# Altium PCB PMOD_SSD.PcbDoc
Units mm, origin at the board's own origin, x right, y up, seen from the top; angles counter-clockwise.
Board outline 40 x 40 mm, 2 copper layers (Top Layer, Bottom Layer); 14 components, 20 nets, 56 pads, 0 vias.
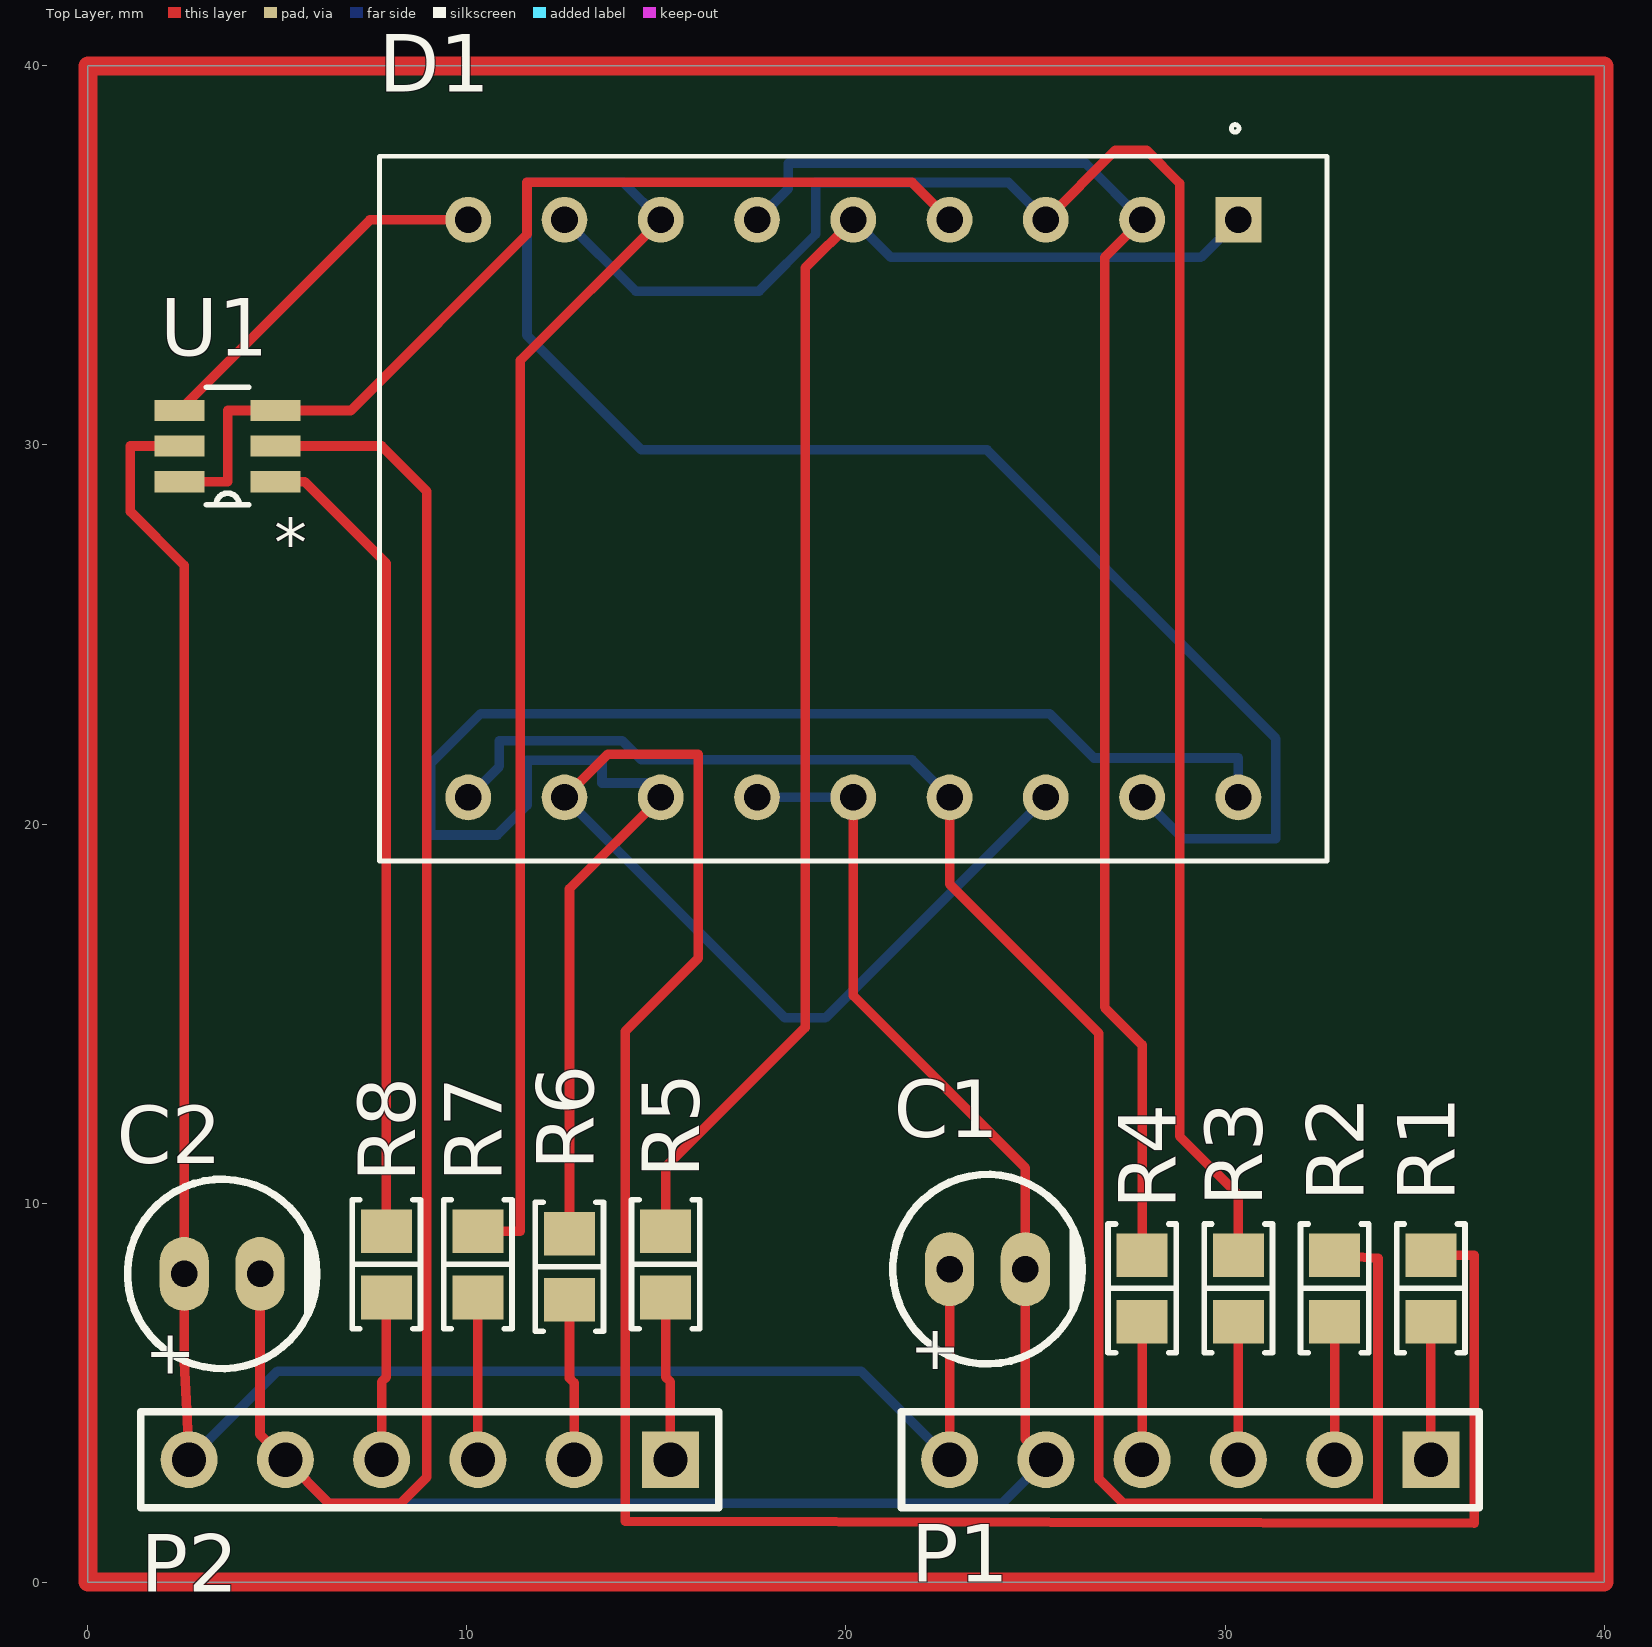
[diagram p0: Top Layer view]
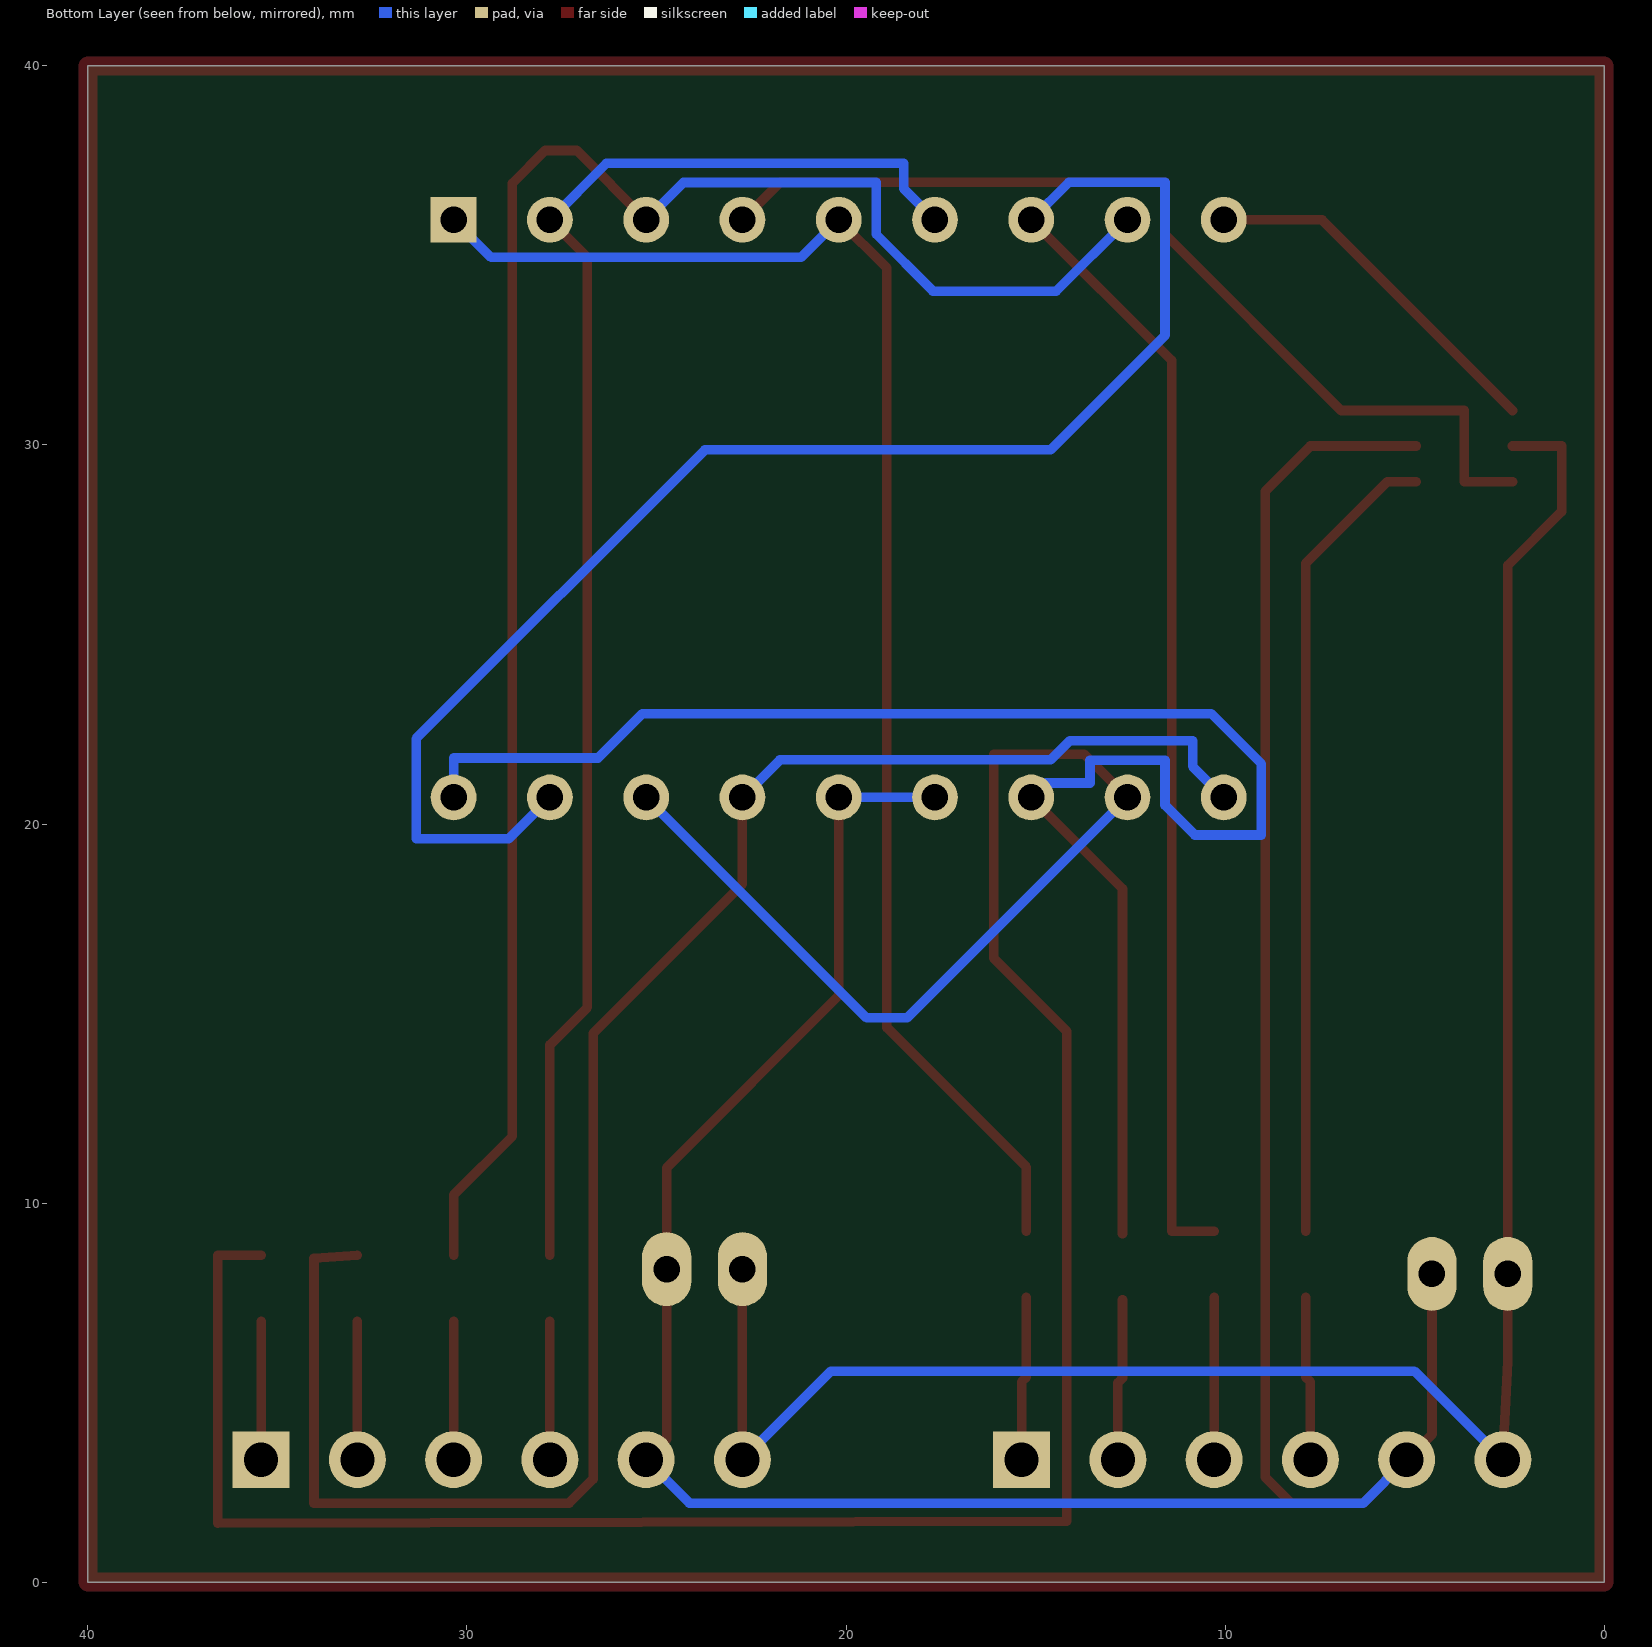
[diagram p1: Bottom Layer view, seen from below]
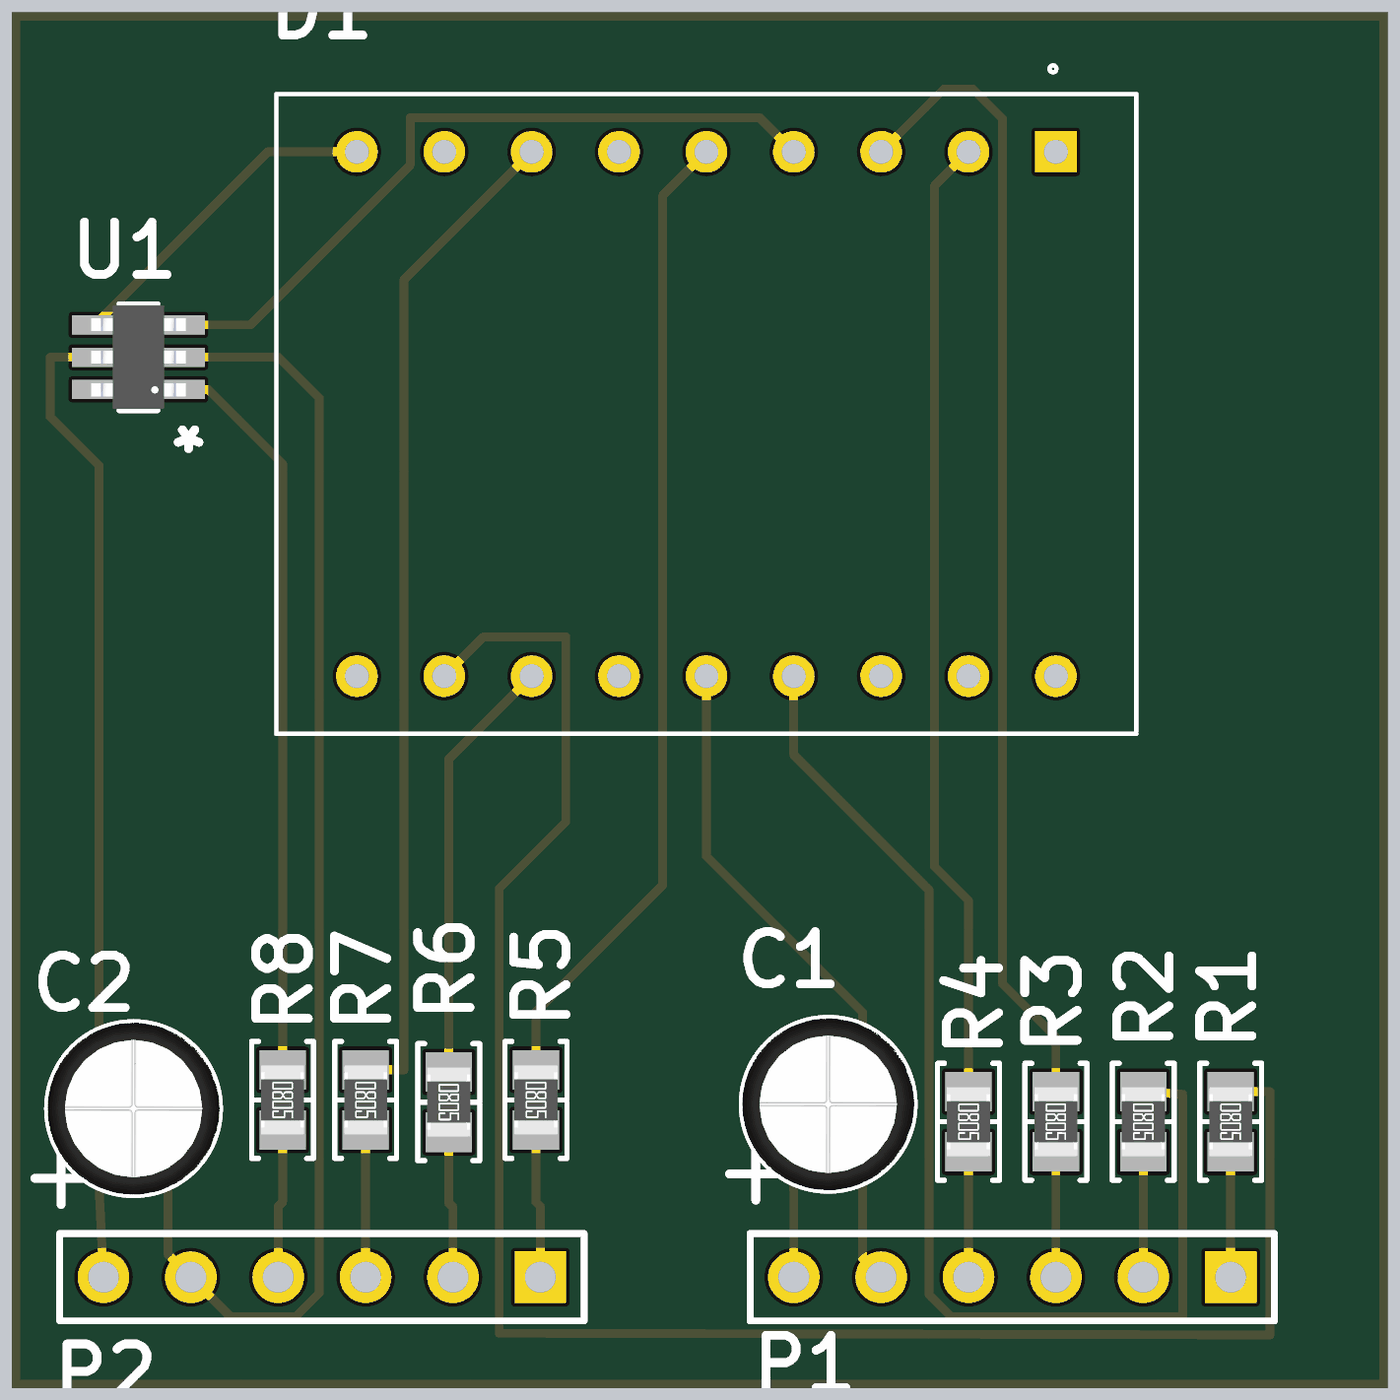
[diagram p2: 3D render of the assembled board from above, using the file's embedded part models]

## Layer stack, top to bottom
Top Solder: solder mask 0.0102, Solder Resist, Dk 3.5
Top Layer: signal copper 0.0356
Dielectric 1: dielectric 0.32, FR-4, Dk 4.8
Bottom Layer: signal copper 0.0356
Bottom Solder: solder mask 0.0102, Solder Resist, Dk 3.5

## Board outline
0,0 0,40 40,40 40,0

## Design rules (kind name [scope] priority, off if disabled: settings)
Clearance [All] p1: gap=0.254 ignorepadtopadclearanceinfootprint=FALSE except(0: Arc-Hole Track-Hole SMDPad-Hole THPad-Hole Via-Hole Fill-Hole Poly-Hole Region-Hole Text-Hole)
PolygonConnect [All] p1: connectstyle=Relief reliefconductorwidth=0.254 reliefentries=4 polygonreliefangle="90 Angle" airgapwidth=0.254
RoutingVias [All] p1: holewidth=0.711 width=1.27 viastyle="Through Hole" minholewidth=0.711 minwidth=1.27 maxholewidth=0.711 maxwidth=1.27
SolderMaskExpansion [All] p1: expansion=0.102 istentingtop=FALSE
Width Width_3 [All] p1: maxlimit=0.254 minlimit=0.254 preferedwidth=0.254
Width Width_2 [All] p2 off: maxlimit=0.254 minlimit=0.254 preferedwidth=0.254
Width Width_1 [All] p3 off: maxlimit=0.254 minlimit=0.254 preferedwidth=0.254
Width [All] p4: maxlimit=1.2 minlimit=0.6 preferedwidth=0.85 checkconnectedcopper=TRUE
30 further rules are at their usual default settings.

## Classes and differential pairs
component class Sheet1: C1 C2 D1 P1 P2 R1 R2 R3 R4 R5 R6 R7 R8

## Components (designator, comment, footprint, x,y, rotation, side; value= is the part's Value field where it differs from the comment)
C1 "0.1uF" "CAP TH ALUM ELEC D5.00mm S2.00mm H12.00mm" 23.733,8.255 r180 top value=1µF
C2 "1µF" "CAP TH ALUM ELEC D5.00mm S2.00mm H12.00mm" 3.54,8.128 r180 top
D1 "DISP1" LED_HDSP-523G 20.193,28.321 r270 top
P1 "Header 6" HDR1X6 35.434,3.227 r180 top
P2 "Header 6" HDR1X6 15.367,3.227 r180 top
R1 "820" "RES 0805_2012" 35.434,7.747 r270 top
R2 "820" "RES 0805_2012" 32.893,7.747 r270 top
R3 "820" "RES 0805_2012" 30.354,7.747 r270 top
R4 "820" "RES 0805_2012" 27.813,7.747 r270 top
R5 "820" "RES 0805_2012" 15.24,8.382 r270 top
R6 "820" "RES 0805_2012" 12.704,8.318 r270 top
R7 "820" "RES 0805_2012" 10.287,8.382 r270 top
R8 "820" "RES 0805_2012" 7.874,8.382 r270 top
U1 "NL27WZ14DTT1G" SOT95P275X110-6N 3.683,29.972 r180 top

## Footprints (in the part's own frame and the unit in brackets; to place one, negate y for a bottom-side part, rotate by r counter-clockwise, add the part's x,y. Pads: shape width x height; smd on the part's side, far side on the other; paste and mask are expansions set on the pad)
"CAP TH ALUM ELEC D5.00mm S2.00mm H12.00mm" [mm] "5mm Diameter 2mm Lead Spacing Aluminum Electrolytic Capacitors Radial, Can"
  oval 1.3x1.95 hole 0.7: 1(1,0) 2(-1,0)
  silkscreen extent -2.5,-2.5 2.5,2.5, body extent -2.51,-2.5 2.5,2.5, height 12
HDR1X6 [mm] "Connector; Header; 6 Position"
  rect 1.5x1.5 hole 0.9: 1(0,0)
  round 1.5 hole 0.9: 2(2.54,0) 3(5.08,0) 4(7.62,0) 5(10.16,0) 6(12.7,0)
  silkscreen extent -1.27,-1.27 13.97,1.27
LED_HDSP-523G [mm]
  rect 1.208x1.208 hole 0.7: 1(-7.62,10.16)
  round 1.208 hole 0.7: 2(-7.62,7.62) 3(-7.62,5.08) 4(-7.62,2.54) 5(-7.62,0) 6(-7.62,-2.54) 7(-7.62,-5.08) 8(-7.62,-7.62) 9(-7.62,-10.16) 10(7.62,-10.16) 11(7.62,-7.62) 12(7.62,-5.08) 13(7.62,-2.54) 14(7.62,0) 15(7.62,2.54) 16(7.62,5.08) 17(7.62,7.62) 18(7.62,10.16)
  silkscreen extent -10.13,-12.5 9.3,12.5
"RES 0805_2012" [mm] "Chip Resistor, 2-Leads, Body 2.00x1.25mm, IPC Medium Density"
  rect 1.15x1.35 smd: 1(-0.875,0) 2(0.875,0)
  silkscreen extent -1.7,-0.9 1.7,0.9, body extent -1,-0.62 1,0.63, height 0.6
SOT95P275X110-6N [mil]
  rect 52x22 smd: 1(-50,37) 2(-50,0) 3(-50,-37) 4(50,-37) 5(50,0) 6(50,37)
  silkscreen extent -22,-61 22,61, body extent -54,-59 54,59, height 43

## Part data
C1: library part UKL2A010KDD, "CAP ALUM 1UF 10% 100V RADIAL", Capacitance=1µF, Device Package="Radial, Can", Lifetime @ Temp.="2000 Hrs @ 85°C", manufacturer=Nichicon, Operating Temperature="-40°C ~ 85°C", Ripple Current @ High Frequency="38mA @ 10kHz", Ripple Current @ Low Frequency="19mA @ 120Hz", Supplier Part Number 1=493-15407-ND, Tolerance=±10%, Voltage - Rated=100V, Applications="General Purpose", componentlink1description=Datasheet, componentlink1url=http://nichicon-us.com/english/products/pdfs/e-ukl.pdf, componentlink2description="DigiKey Link", componentlink2url=http://digikey.com/product-detail/en/nichicon/UKL2A010KDD/493-15407-ND/2598552, Height - Seated (Max)="0.472\" (12.00mm)", lastupdated="4.09.2020 23:28:57", Lead Spacing="0.079\" (2.00mm)", Lifecycle Status=Active, Minimum Order=1, Mounting Type="Through Hole", Package / Case="Radial, Can", packaging=Bulk, Part Number=UKL2A010KDD, Part Status=Active, partid=21600, Polarization=Polar, price=0.35, series=UKL, Size / Dimension="0.197\" Dia (5.00mm)", Supplier 1=DigiKey
C2: library part UKL2A010KDD, "CAP ALUM 1UF 10% 100V RADIAL", Device Package="Radial, Can", Lifetime @ Temp.="2000 Hrs @ 85°C", manufacturer=Nichicon, Operating Temperature="-40°C ~ 85°C", Ripple Current @ High Frequency="38mA @ 10kHz", Ripple Current @ Low Frequency="19mA @ 120Hz", Supplier Part Number 1=493-15407-ND, Tolerance=±10%, Voltage - Rated=100V, Applications="General Purpose", Capacitance=1µF, componentlink1description=Datasheet, componentlink1url=http://nichicon-us.com/english/products/pdfs/e-ukl.pdf, componentlink2description="DigiKey Link", componentlink2url=http://digikey.com/product-detail/en/nichicon/UKL2A010KDD/493-15407-ND/2598552, Height - Seated (Max)="0.472\" (12.00mm)", lastupdated="4.09.2020 23:28:57", Lead Spacing="0.079\" (2.00mm)", Lifecycle Status=Active, Minimum Order=1, Mounting Type="Through Hole", Package / Case="Radial, Can", packaging=Bulk, Part Number=UKL2A010KDD, Part Status=Active, partid=21600, Polarization=Polar, price=0.35, series=UKL, Size / Dimension="0.197\" Dia (5.00mm)", Supplier 1=DigiKey
D1: library part HDSP-523G, "Display Modules - LED Character and Numeric Green 7-Segment 2 Character Common Cathode 2V 10mA 0.732 H x 0.984 W x 0.315 D (18.60mm x 25.00mm x 8.00mm) 18-DIP (0.600, 15.24mm)", Package=None, Availability="In Stock", Check_prices=https://www.snapeda.com/parts/HDSP-523G/Broadcom+Limited/view-part/?ref=eda, MF="Broadcom Limited", MP=HDSP-523G, price=None, Purchase-URL=https://pricing.snapeda.com/search/part/HDSP-523G/?ref=eda, SnapEDA_Link=https://www.snapeda.com/parts/HDSP-523G/Broadcom+Limited/view-part/?ref=snap
P1 P2: "Header, 6-Pin", LatestRevisionDate=17-Jul-2002, LatestRevisionNote="Re-released for DXP Platform.", Publisher="Altium Limited"
R1 R2 R3 R4 R5 R6 R7 R8: library part RNCS0805BKE49R9, "RES 49.9 OHM 0.1% 1/10W 0805", Device Package="0805 (2012 Metric)", manufacturer="Stackpole Electronics Inc", Operating Temperature="-55°C ~ 155°C", Power (Watts)="0.1W, 1/10W", Ratings=AEC-Q200, Resistance="49.9 Ohms", Supplier Device Package=0805, Supplier Part Number 1=RNCS0805BKE49R9CT-ND, Temperature Coefficient=±25ppm/°C, Tolerance=±0.1%, componentlink1description=Datasheet, componentlink1url=https://www.seielect.com/catalog/sei-rncs_rnch.pdf, componentlink2description="DigiKey Link", componentlink2url=https://www.digikey.com/en/products/detail/stackpole-electronics-inc/RNCS0805BKE49R9/1800098, Composition="Thin Film", Features="Anti-Corrosive, Automotive AEC-Q200, Moisture Resistant", Height - Seated (Max)="0.026\" (0.65mm)", lastupdated="9.06.2023 19:55:35", Lifecycle Status=Active, Minimum Order=1, Number of Terminations=2, Package / Case="0805 (2012 Metric)", packaging=TapeAndReel, Part Number=RNCS0805BKE49R9, Part Status=Active, partid=27719, price=0.07, series=RNCS, Size / Dimension="0.079\" L x 0.049\" W (2.00mm x 1.25mm)", Supplier 1=DigiKey
U1: "Inverter IC 2 Channel Schmitt Trigger 6-TSOP", Package="TSOP-6 ON Semiconductor", Availability="In Stock", Check_prices=https://www.snapeda.com/parts/NL27WZ14DTT1G/ON%20Semiconductor/view-part/292209/?ref=eda, MF="ON Semiconductor", MP=NL27WZ14DTT1G, price=None, SnapEDA_Link=https://www.snapeda.com/parts/NL27WZ14DTT1G/ON%20Semiconductor/view-part/292209/?ref=snap

## Nets (pads, with @x,y where several pads share a name; then routed paths per layer and width w, separated by ;. In a path a pad name is that pad's centre, name@x,y a point inside that pad or via, vN(x,y) a via of type N, cw(c..) or ccw(c..) an arc to the next point about the centre after c; other vN are vias at no path point)
NetC1_1: C1.1 C2.1 P1.6 P2.6 U1.5 | length 55.7
  Top Layer w0.254: U1.5 1.118,29.972 1.118,28.245 2.54,26.822 C2.1 2.54,5.817 P2.6 ; P1.6 22.734,5.74 C1.1
  Bottom Layer w0.254: P2.6 5.002,5.563 20.398,5.563 P1.6
NetC1_2: C1.2 C2.2 D1.13 D1.14 P1.5 P2.5 U1.2 | length 83.3
  Top Layer w0.254: C2.2 4.54,3.894 P2.5 6.351,2.083 8.255,2.083 8.941,2.769 8.941,28.778 7.747,29.972 U1.2 ; D1.14 20.193,15.469 24.733,10.929 C1.2 24.733,3.768 P1.5
  Bottom Layer w0.254: P2.5 6.351,2.083 24.129,2.083 P1.5 ; D1.13 D1.14
NetD1_1: D1.1 D1.5 R5.1 | length 39.7
  Top Layer w0.254: R5.1 15.24,10.947 18.923,14.63 18.923,34.671 D1.5
  Bottom Layer w0.254: D1.5 21.184,34.95 29.362,34.95 D1.1
NetD1_2: D1.2 D1.6 R4.1 | length 39.9
  Top Layer w0.254: R4.1 27.813,14.173 26.822,15.164 26.822,34.95 D1.2
  Bottom Layer w0.254: D1.6 18.472,36.76 18.472,37.434 26.32,37.434 D1.2
NetD1_3: D1.3 D1.8 R3.1 | length 49.4
  Top Layer w0.254: D1.3 27.102,37.77 27.94,37.77 28.804,36.906 28.804,11.761 30.354,10.211 R3.1
  Bottom Layer w0.254: D1.8 14.453,34.061 17.704,34.061 19.202,35.56 19.202,36.926 24.288,36.926 D1.3
NetD1_4: D1.4 U1.3 U1.6 | length 25.9
  Top Layer w0.254: U1.6 3.683,29.032 3.683,30.912 U1.3 6.934,30.912 11.582,35.56 11.582,36.932 21.742,36.932 D1.4
NetD1_7: D1.7 D1.17 R7.1 | length 68.1
  Top Layer w0.254: R7.1 11.405,9.257 11.405,32.233 D1.7
  Bottom Layer w0.254: D1.7 14.122,36.932 11.582,36.932 11.582,32.893 14.605,29.87 23.724,29.87 31.344,22.25 31.344,19.609 28.905,19.609 D1.17
NetD1_9: D1.9 U1.4 | length 9.7
  Top Layer w0.254: U1.4 7.442,35.941 D1.9
NetD1_10: D1.10 D1.15 R2.1 | length 49.2
  Top Layer w0.254: D1.15 22.733,18.415 26.67,14.478 26.67,2.718 27.305,2.083 34.036,2.083 34.036,8.546 R2.1
  Bottom Layer w0.254: D1.10 10.852,21.52 10.852,22.194 14.101,22.194 14.603,21.692 21.742,21.692 D1.15
NetD1_11: D1.11 D1.16 R1.1 | length 73.2
  Top Layer w0.254: D1.11 13.716,21.844 16.104,21.844 16.104,16.459 14.173,14.529 14.173,1.6 36.576,1.549 36.576,8.622 R1.1
  Bottom Layer w0.254: D1.11 18.39,14.884 19.456,14.884 D1.16
NetD1_12: D1.12 D1.18 R6.1 | length 46.1
  Top Layer w0.254: R6.1 12.704,18.292 D1.12
  Bottom Layer w0.254: D1.12 14.732,21.082 13.564,21.082 13.564,21.686 11.582,21.686 11.582,20.498 10.795,19.71 9.042,19.71 9.042,21.59 10.363,22.911 25.375,22.911 26.543,21.742 30.353,21.742 D1.18
NetP1_1: P1.1 R1.2 | length 3.6
  Top Layer w0.254: P1.1 R1.2
NetP1_2: P1.2 R2.2 | length 3.6
  Top Layer w0.254: P1.2 32.894,5.029 R2.2
NetP1_3: P1.3 R3.2 | length 3.6
  Top Layer w0.254: P1.3 R3.2
NetP1_4: P1.4 R4.2 | length 3.6
  Top Layer w0.254: P1.4 27.814,5.029 R4.2
NetP2_1: P2.1 R5.2 | length 4.3
  Top Layer w0.254: R5.2 15.24,5.41 15.367,5.283 P2.1
NetP2_2: P2.2 R6.2 | length 4.3
  Top Layer w0.254: R6.2 12.704,5.381 12.827,5.258 P2.2
NetP2_3: P2.3 R7.2 | length 4.3
  Top Layer w0.254: P2.3 R7.2
NetP2_4: P2.4 R8.2 | length 4.3
  Top Layer w0.254: P2.4 7.747,5.283 7.874,5.41 R8.2
NetR8_1: R8.1 U1.1 | length 21.4
  Top Layer w0.254: U1.1 5.715,29.032 7.874,26.873 R8.1
copper on no net: | length 160
  Top Layer w0.5: 0,0 0,40 40,40 40,0 0,0

## Text inside footprints (layer, text, board x,y; h text height)
C1: Top Overlay "+" at 23.033,7.005 h2 r180
C2: Top Overlay "+" at 2.84,6.878 h2 r180
U1: Top Overlay "*" at 5.791,28.6 h1.27 r180; Mechanical 13 "*" at 5.791,28.6 h1.27 r180